# Altium PCB Logger_PCB_2.PcbDoc
Units mm, origin at the board's own origin, x right, y up, seen from the top; angles counter-clockwise.
Board outline 93.13 x 61.13 mm, 2 copper layers (Top Layer, Bottom Layer); 107 components, 63 nets, 336 pads, 0 vias.
Unrouted connection lines stored in the file: 257.
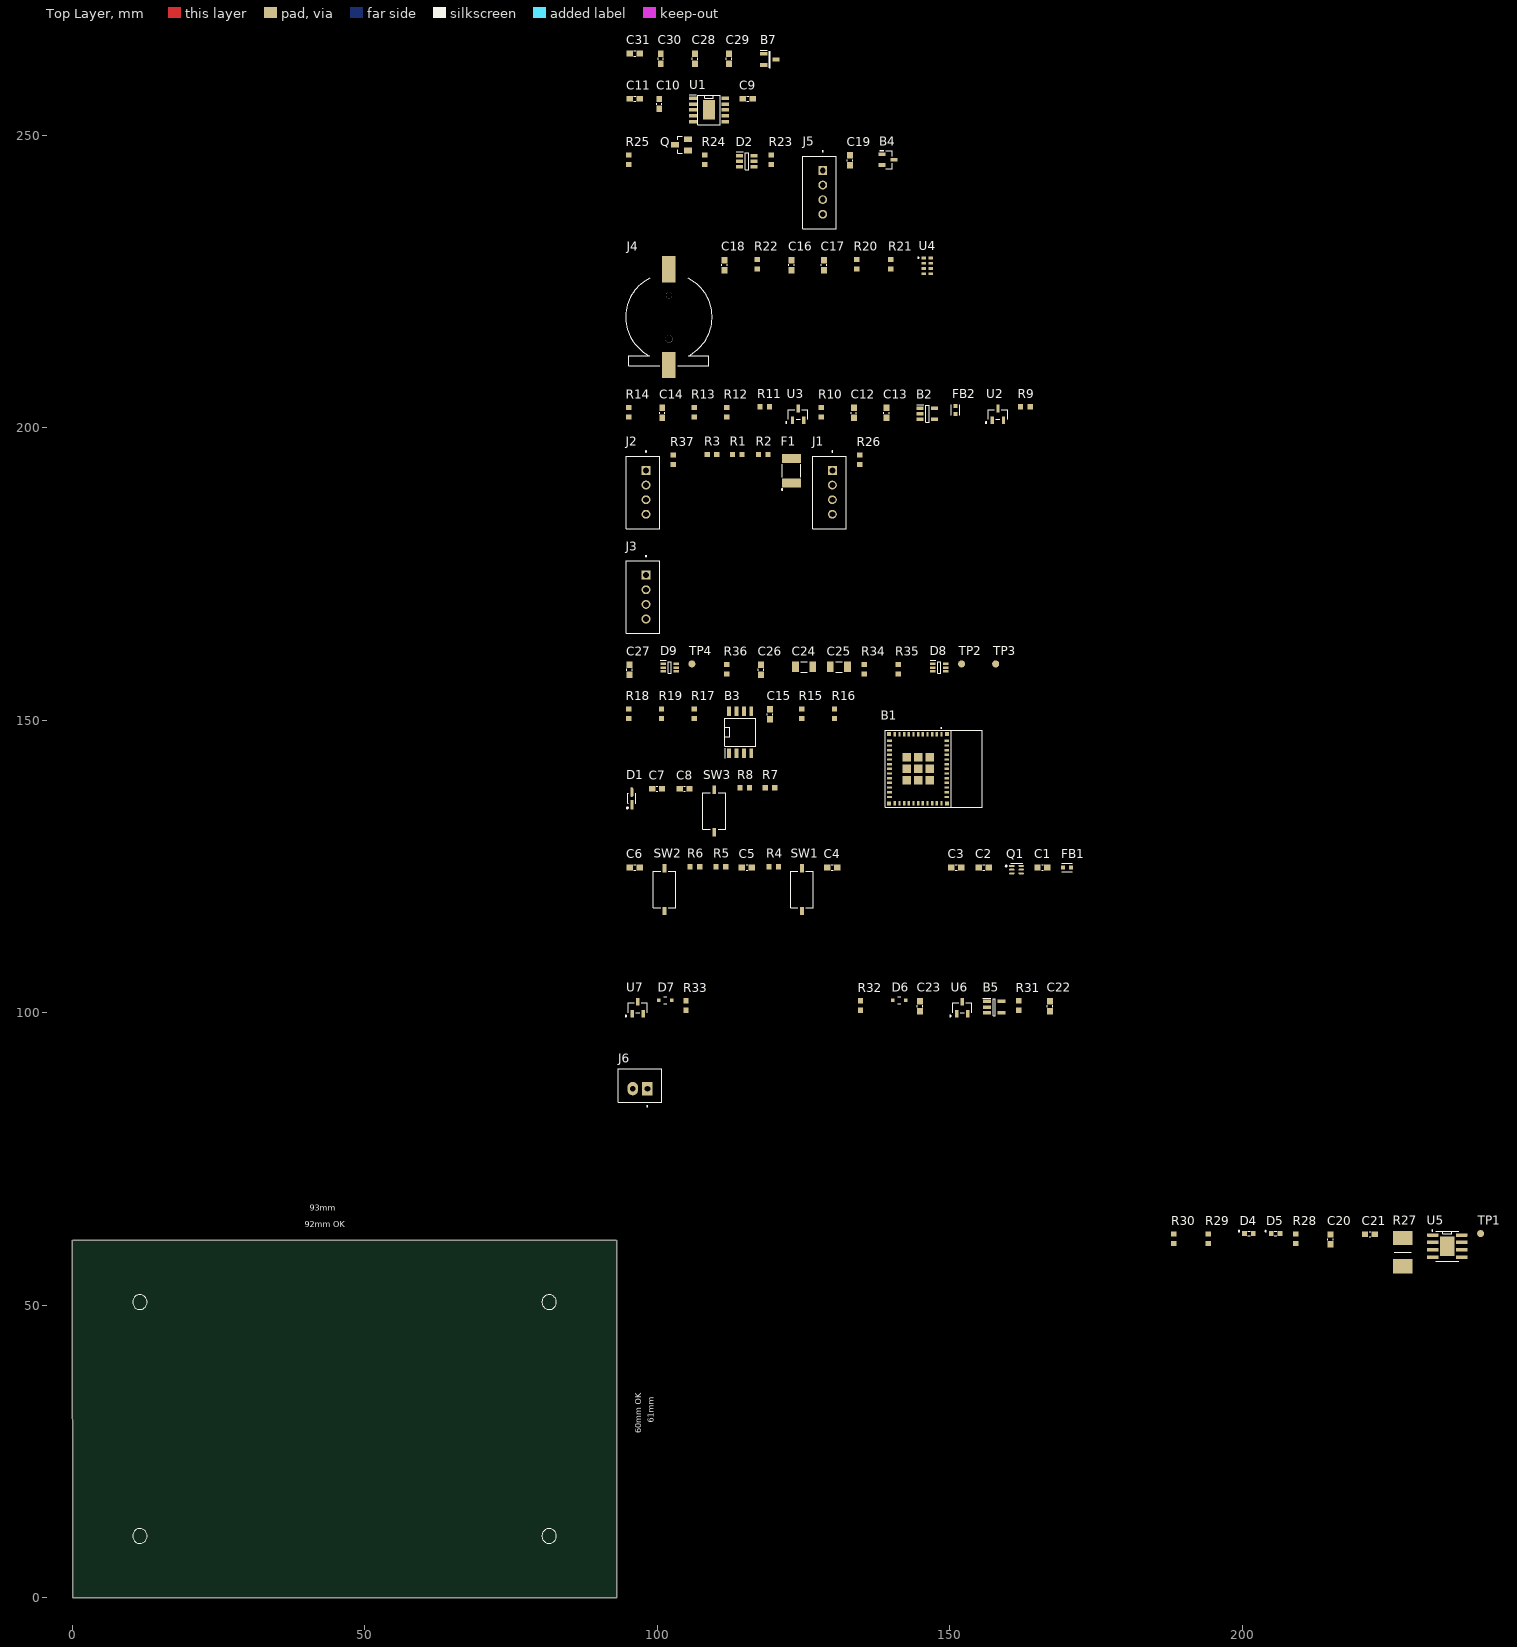
[diagram p0: Top Layer view]
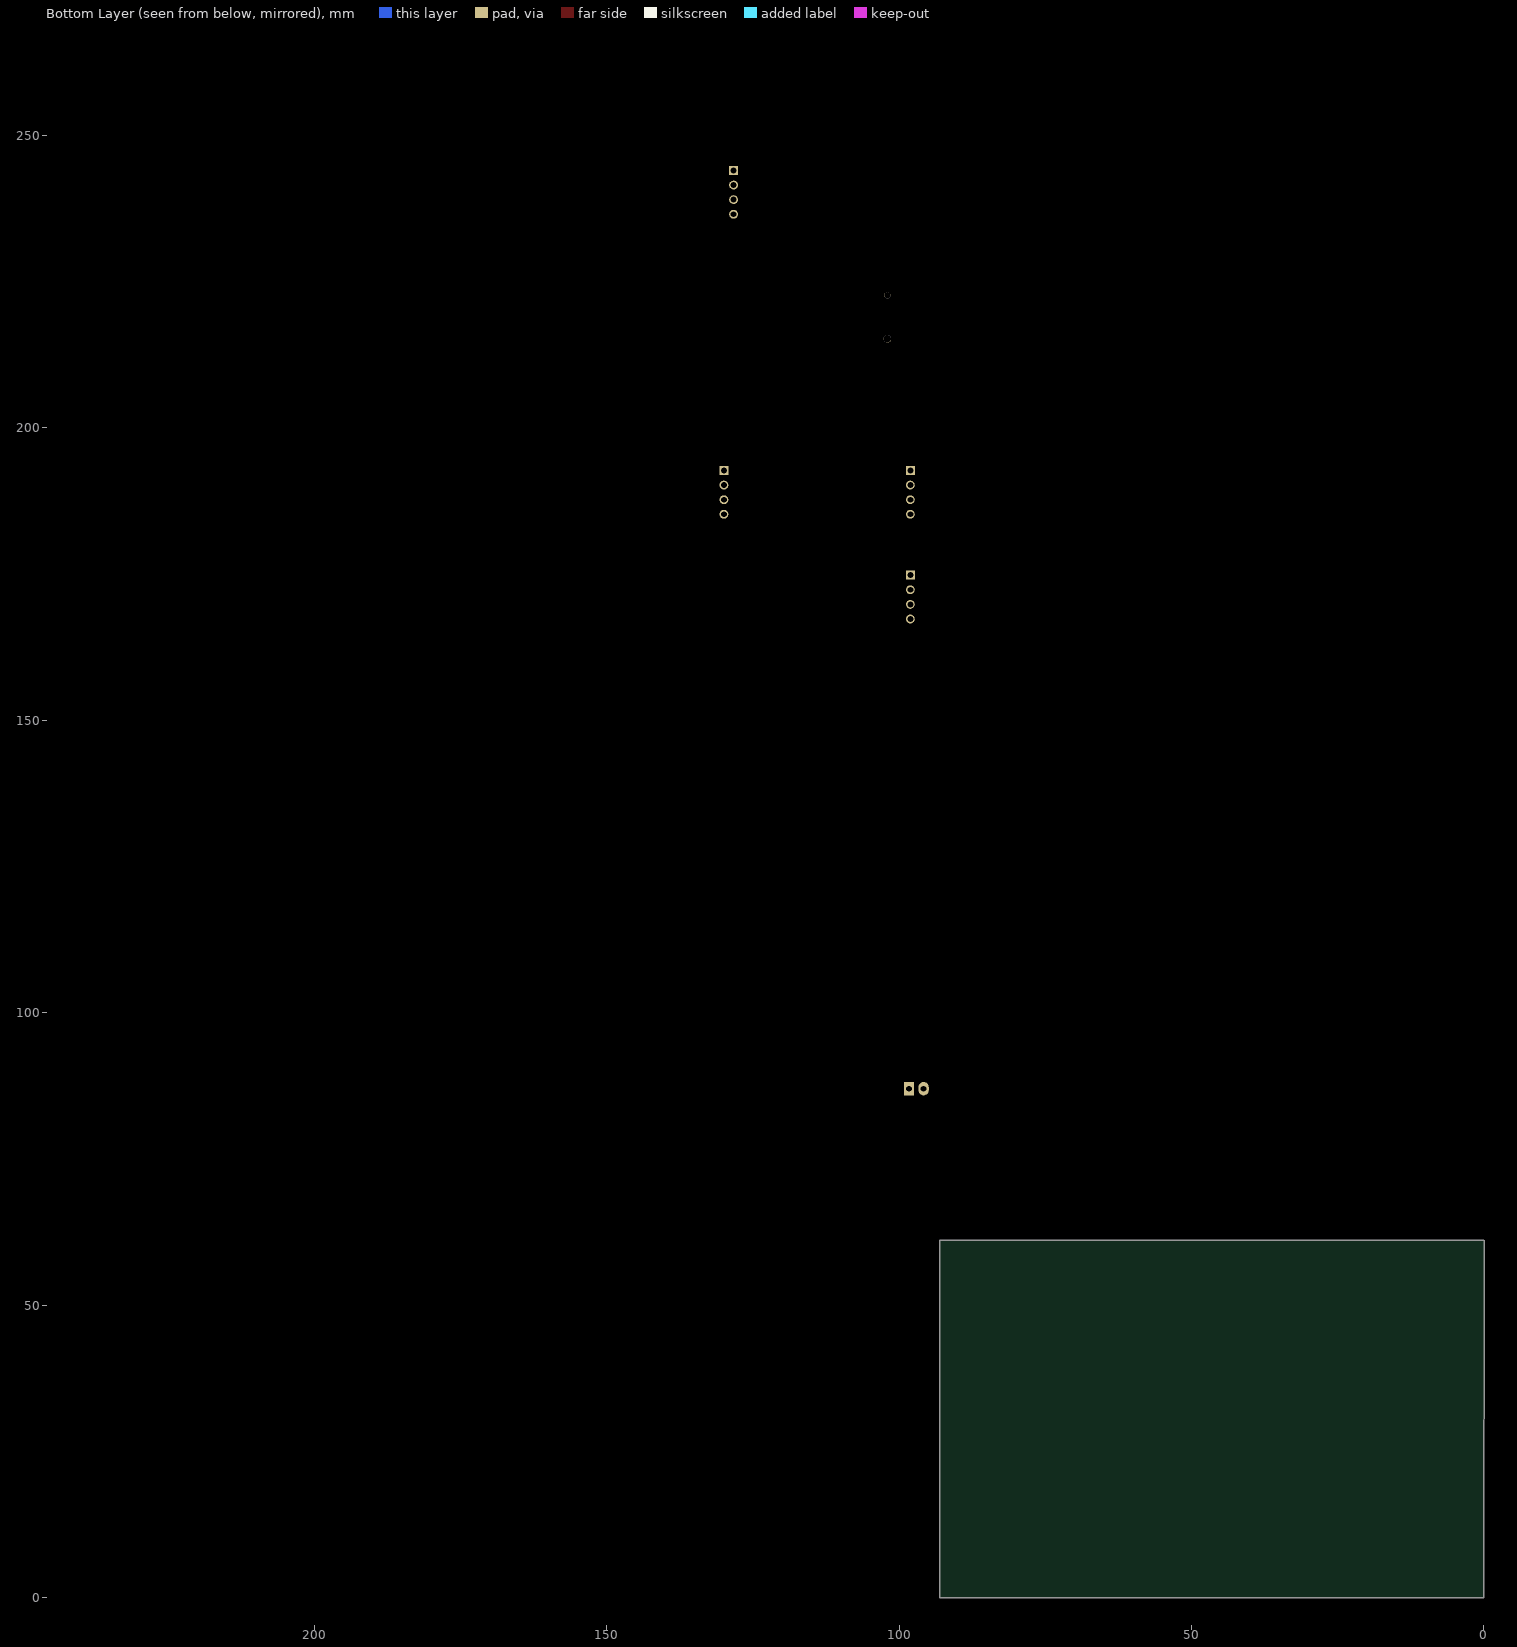
[diagram p1: Bottom Layer view, seen from below]

## Layer stack, top to bottom
Top Solder: solder mask 0.0102, Solder Resist, Dk 3.5
Top Layer: signal copper 0.0356
Dielectric 1: dielectric 0.32, FR-4, Dk 4.8
Bottom Layer: signal copper 0.0356
Bottom Solder: solder mask 0.0102, Solder Resist, Dk 3.5

## Board outline
0,-0.064 93,-0.064 93.064,0 93.064,61 93,61.064 0,61.064 -0.064,61

## Design rules (kind name [scope] priority, off if disabled: settings)
Clearance [All] p1: gap=0.254 ignorepadtopadclearanceinfootprint=FALSE except(0: Arc-Hole Track-Hole SMDPad-Hole THPad-Hole Via-Hole Fill-Hole Poly-Hole Region-Hole Text-Hole)
PolygonConnect [All] p1: connectstyle=Relief reliefconductorwidth=0.254 reliefentries=4 polygonreliefangle="90 Angle" airgapwidth=0.254
RoutingVias [All] p1: holewidth=0.711 width=1.27 viastyle="Through Hole" minholewidth=0.711 minwidth=1.27 maxholewidth=0.711 maxwidth=1.27
SolderMaskExpansion [All] p1: expansion=0.102 istentingtop=FALSE
Width [All] p1: maxlimit=0.254 minlimit=0.254 preferedwidth=0.254
30 further rules are at their usual default settings.

## Classes and differential pairs
net class POWER_NET: 3V3D Mout NetB7_3 VBUS Vin2
component class Voltage_Regulator(ULP): B7 C28 C29 C30 C31
component class USB_Programmer: C9 C10 C11 U1
component class USB_CON: B4 C19 D2 J5 Q R23 R24 R25
component class ULP_RTC: C16 C17 C18 J4 R20 R21 R22 U4
component class ULP_ADC: B2 C12 C13 C14 FB2 R9 R10 R11 R12 R13 R14 U2 U3
component class TopDesign: F1 J1 J2 R1 R2 R3 R26 R37
component class Temp_Sensor: J3
component class Power_MUX: C24 C25 C26 C27 D8 D9 R34 R35 R36 TP2 TP3 TP4
component class NOR_FLASH: B3 C15 R15 R16 R17 R18 R19
component class Designator: C7 C8 D1 R7 R8 SW3
component class Battery_Protection: B5 C22 C23 D6 D7 J6 R31 R32 R33 U6 U7
component class Battery_Charger: C20 C21 D4 D5 R27 R28 R29 R30 TP1 U5

## Components (designator, comment, footprint, x,y, rotation, side; value= is the part's Value field where it differs from the comment)
B1 "ESP32-H2-MINI-1-N4" ESP32-H2-MINI-1-NX 147.3,141.694 r270 top
B2 "MCP3021" MCP3021A5T-E_OT 146.177,202.438 r0 top
B3 "W25Q64JVSSIQ" W25Q64JVSSIQ 114.173,147.955 r90 top
B4 "AP2331W-7" AP2331W-7-(SOT-23-3) 139.446,245.872 r0 top
B5 "DW03" DW03 157.607,100.965 r0 top
B7 "MCP1700T" MCP1700T-SOT23 119.253,263.017 r0 top
C1 "100 nF" CAP_0603 165.862,124.841 r0 top
C2 "22 uF" CAP_0603 155.829,124.841 r0 top
C3 "10 nF" CAP_0603 151.13,124.841 r0 top
C4 "100 nF" CAP_0603 129.921,124.841 r0 top
C5 "1 uF" CAP_0603 115.316,124.841 r0 top
C6 "100 nF" CAP_0603 96.139,124.841 r0 top
C7 "1 uF" CAP_0603 99.949,138.303 r0 top
C8 "100 nF" CAP_0603 104.648,138.303 r0 top
C9 "100 nF" CAP_0603 115.443,256.286 r0 top
C10 "100 nF" CAP_0603 100.33,255.397 r90 top
C11 "100 nF" CAP_0603 96.139,256.286 r0 top
C12 "1 uF" CAP_0603 133.604,202.565 r90 top
C13 "10 nF" CAP_0603 139.192,202.565 r90 top
C14 "100 nF" CAP_0603 100.838,202.565 r90 top
C15 "100 nF" CAP_0603 119.253,151.003 r90 top
C16 "1 uF" CAP_0603 122.936,227.838 r90 top
C17 "100 nF" CAP_0603 128.524,227.838 r90 top
C18 "1 uF" CAP_0603 111.506,227.838 r90 top
C19 "100 nF" CAP_0603 132.969,245.745 r90 top
C20 "10 uF" CAP_0603 215.138,61.214 r90 top
C21 "10 uF" CAP_0603 221.869,62.103 r0 top
C22 "10 uF" CAP_0603 167.132,101.092 r90 top
C23 "100 nF" CAP_0603 144.907,101.092 r90 top
C24 "47 uF" "CAP SMD 1206" 125.095,159.131 r0 top
C25 "100 uF" "CAP SMD 1206" 131.064,159.131 r0 top
C26 "1 uF" CAP_0603 117.729,158.623 r90 top
C27 "1 uF" CAP_0603 95.25,158.623 r90 top
C28 "2.2 uF" CAP_0603 106.426,263.144 r90 top
C29 "10 uF" CAP_0603 112.268,263.144 r90 top
C30 "100 nF" CAP_0603 100.584,263.144 r90 top
C31 "1 uF" CAP_0603 96.139,264.033 r0 top
D1 "BSD3A031V" MCC_SOD-323_IPC_A 95.631,136.652 r90 top
D2 "USBLC6-2SC6" USBLC6-2SC6 115.316,245.618 r0 top
D4 "RED" "LED SMD 0603" 201.168,62.23 r0 top
D5 "YELLOW" "LED SMD 0603" 205.74,62.23 r0 top
D6 "PESD5V0S1BA" TVS_SOD-323 141.351,102.108 r0 top
D7 "PESD5V0S1BA" TVS_SOD-323 101.346,102.108 r0 top
D8 "LM66100DCKR" LM66100DCKR 148.209,159.004 r0 top
D9 "LM66100DCKR" LM66100DCKR 102.108,159.004 r0 top
F1 "MF-MSMF050-2" Fuse_SMD_1812_1A 122.936,192.659 r90 top
FB1 "BLM18KG601SN1D" FBead_Murata_BLM18KG601SN1D 170.053,124.841 r0 top
FB2 "BLM18KG601SN1D" FBead_Murata_BLM18KG601SN1D 151.003,203.073 r90 top
J1 "JST_4P_P=2.5mm" JST_4P_Straight_P=2.5mm 129.413,188.976 r90 top
J2 "JST_4P_P=2.5mm" JST_4P_Straight_P=2.5mm 97.536,188.976 r90 top
J3 "JST_4P_P=2.5mm" JST_4P_Straight_P=2.5mm 97.536,171.069 r90 top
J4 "Bat_Con_CR1220" Bat_Con_CR1220 101.981,218.948 r0 top
J5 "JST_4P_P=2.5mm" JST_4P_Straight_P=2.5mm 127.762,240.284 r90 top
J6 "2_Way_JST" 2_Way_JST_Connector 97.048,86.995 r0 top
Q "MMBT2222*" "Bipolar _BJT_ Transistor" 104.14,248.412 r90 top
Q1 "UMH3NTN-(Dual Transistor With Base Res)" "UMH3NTN-(Dual Transistor With Base Res-SOT-363)" 161.417,124.46 r0 top
R1 "10 KOhm" Res_0603 113.665,195.453 r0 top
R2 "10 KOhm" Res_0603 118.11,195.453 r0 top
R3 "0 Ohm" Res_0603 109.347,195.453 r0 top
R4 "10 KOhm" Res_0603 119.888,124.968 r0 top
R5 "DNP" Res_0603 110.871,124.968 r0 top
R6 "3.3 KOhm" Res_0603 106.426,124.968 r0 top
R7 "33 KOhm" Res_0603 119.253,138.43 r0 top
R8 "1 KOhm" Res_0603 114.935,138.43 r0 top
R9 "100 KOhm" Res_0603 162.941,203.581 r0 top
R10 "33 KOhm" Res_0603 128.016,202.692 r90 top
R11 "4.7 KOhm" Res_0603 118.364,203.581 r0 top
R12 "10 KOhm" Res_0603 111.887,202.692 r90 top
R13 "1  KOhm" Res_0603 106.299,202.692 r90 top
R14 "100 KOhm" Res_0603 95.123,202.692 r90 top
R15 "10 KOhm" Res_0603 124.714,151.13 r90 top
R16 "10 KOhm" Res_0603 130.302,151.13 r90 top
R17 "100 KOhm" Res_0603 106.299,151.13 r90 top
R18 "100 KOhm" Res_0603 95.123,151.13 r90 top
R19 "100 KOhm" Res_0603 100.711,151.13 r90 top
R20 "0 Ohm" Res_0603 134.112,227.965 r90 top
R21 "100 KOhm" Res_0603 139.954,227.965 r90 top
R22 "470 KOhm" Res_0603 117.094,227.965 r90 top
R23 "22KOhm" Res_0603 119.507,245.872 r90 top
R24 "1 KOhm" Res_0603 108.077,245.872 r90 top
R25 "10 KOhm" Res_0603 95.123,245.872 r90 top
R26 "470 Ohm" Res_0603 134.62,194.564 r90 top
R27 "0.2 Ohm , 1W" RES_2512 227.457,59.055 r90 top
R28 "1.33 KOhm , 1%" Res_0603 209.169,61.341 r90 top
R29 "1 KOhm" Res_0603 194.183,61.341 r90 top
R30 "1 KOhm" Res_0603 188.341,61.341 r90 top
R31 "100 Ohm" Res_0603 161.798,101.219 r90 top
R32 "10 KOhm" Res_0603 134.747,101.219 r90 top
R33 "10 KOhm" Res_0603 104.902,101.219 r90 top
R34 "100 Ohm" Res_0603 135.382,158.75 r90 top
R35 "1.5 MOhm" Res_0603 141.224,158.75 r90 top
R36 "100 Ohm" Res_0603 111.887,158.75 r90 top
R37 "560 Ohm" Res_0603 102.743,194.564 r90 top
SW1 "SPST_SMD_Tactile_sw" SPST_SMD_6mm 124.714,121.031 r90 top
SW2 "SPST_SMD_Tactile_sw" SPST_SMD_6mm 101.219,121.031 r90 top
SW3 "SPST_SMD_Tactile_sw" SPST_SMD_6mm 109.728,134.493 r90 top
TP1 "Test_Point" Test_Point 240.792,62.23 r90 top
TP2 "V1" Test_Point 152.019,159.639 r90 top
TP3 "Test_Point" Test_Point 157.861,159.639 r90 top
TP4 "V2" Test_Point 105.918,159.639 r90 top
U1 "CH343K" CH343K 108.839,254.381 r0 top
U2 "SI2333CDS" SOT-23 158.242,202.311 r0 top
U3 "SI2302CDS" SOT-23 124.079,202.311 r0 top
U4 "RV-3028-C7" IC_RV-3028-C7 146.177,227.711 r0 top
U5 "TP4056" TP4056-SOP-8-EP 235.077,60.071 r0 top
U6 "SI2333CDS" SOT-23 152.146,100.838 r0 top
U7 "SI2302CDS" SOT-23 96.647,100.838 r0 top

## Footprints (in the part's own frame and the unit in brackets; to place one, negate y for a bottom-side part, rotate by r counter-clockwise, add the part's x,y. Pads: shape width x height; smd on the part's side, far side on the other; paste and mask are expansions set on the pad)
2_Way_JST_Connector [mm] "2 Way JST Connector, Pitch=2.5mm"
  rect 1.778x2.286 hole 1: 1(1.25,0)
  oval 1.778x2.286 hole 1: 2(-1.25,0)
  silkscreen extent -3.7,-3.07 3.7,3.4, body extent -3.7,-2.35 3.7,3.4, height 7
AP2331W-7-(SOT-23-3) [mm] "AP2331W-7-(SOT-23-3)"
  rrect15% 1.18x0.61 smd: 1(-1.025,0.915) 2(-1.025,-0.915) 3(1.025,0)
  silkscreen extent -1.4,-1.53 0.7,1.53, body extent -1.2,-1.45 1.2,1.45, height 1.2
Bat_Con_CR1220 [mm]
  rect 2.3x4.5 smd: 1(0,-8.2) 2(0,8.2)
  round 1.3 hole 1.3 unplated: MP1(0,-3.725)
  round 1.05 hole 1.05 unplated: MP2(0,3.725)
  silkscreen extent -7.4,-8.31 7.4,6.63, body extent -7.37,-9.6 7.37,9.6, height 4.48
"Bipolar _BJT_ Transistor" [mm] "Bipolar _BJT_ Transistor NPN 30V 600mA 250MHz 350mW Surface Mount SOT-23-3"
  rect 1x1.4 smd: B(-0.95,-1.1) C(0,1.1) E(0.95,-1.1)
  silkscreen extent -1.42,-0.15 1.42,0.66, body extent -1.45,-1.2 1.45,1.2, height 1.11
"CAP SMD 1206" [mm] "CAP SMD 1206, Length 3.20"
  rect 1.16x1.82 smd: 1(-1.475,0) 2(1.475,0)
  silkscreen extent -0.57,-0.9 0.57,0.9, body extent -1.59,-0.8 1.61,0.8, height 0.88
CAP_0603 [mm]
  rect 1.1x1 smd: 1(-0.85,0) 2(0.85,0)
  silkscreen extent -0.15,-0.45 0.15,0.45, body extent -0.85,-0.45 0.75,0.45, height 0.79
CH343K [mm] "ESSOP-10-150mil-1mm"
  rect 2.1x3.3 smd paste-3: 0(0,0)
  rect 1.31x0.6 smd: 1(-2.75,2) 2(-2.75,1) 3(-2.75,0) 4(-2.75,-1) 5(-2.75,-2) 6(2.75,-2) 7(2.75,-1) 8(2.75,0) 9(2.75,1) 10(2.75,2)
  silkscreen extent -3.35,-2.5 1.95,2.59, body extent -3,-2.5 3,2.5, height 1.6
DW03 [mm] "SOT-23-5"
  rect 1.4x0.6 smd: 1(-1.25,0.95) 2(-1.25,0) 3(-1.25,-0.95) 4(1.25,-0.95) 5(1.25,0.95)
  silkscreen extent -1.95,-1.45 0.2,1.5, body extent -1.35,-1.45 1.35,1.45, height 1.45
ESP32-H2-MINI-1-NX [mm] "With_PCB_Antenna"
  rect 0.8x0.4 smd: 1(-5.9,1.3) 2(-5.9,0.5) 3(-5.9,-0.3) 4(-5.9,-1.1) 5(-5.9,-1.9) 6(-5.9,-2.7) 7(-5.9,-3.5) 8(-5.9,-4.3) 9(-5.9,-5.1) 10(-5.9,-5.9) 11(-5.9,-6.7) 25(5.9,-6.7) 26(5.9,-5.9) 27(5.9,-5.1) 28(5.9,-4.3) 29(5.9,-3.5) 30(5.9,-2.7) 31(5.9,-1.9) 32(5.9,-1.1) 33(5.9,-0.3) 34(5.9,0.5) 35(5.9,1.3)
  rect 0.4x0.8 smd: 12(-4.8,-7.6) 13(-4,-7.6) 14(-3.2,-7.6) 15(-2.4,-7.6) 16(-1.6,-7.6) 17(-0.8,-7.6) 18(0,-7.6) 19(0.8,-7.6) 20(1.6,-7.6) 21(2.4,-7.6) 22(3.2,-7.6) 23(4,-7.6) 24(4.8,-7.6) 36(4.8,2.2) 37(4,2.2) 38(3.2,2.2) 39(2.4,2.2) 40(1.6,2.2) 41(0.8,2.2) 42(0,2.2) 43(-0.8,2.2) 44(-1.6,2.2) 45(-2.4,2.2) 46(-3.2,2.2) 47(-4,2.2) 48(-4.8,2.2)
  rect 1.45x1.45 smd: 49(0,-2.7) 54(-1.975,-2.7) 55(-1.975,-4.675) 56(0,-4.675) 57(1.975,-4.675) 58(1.975,-2.7) 59(1.975,-0.725) 60(0,-0.725) 61(-1.975,-0.725)
  rect 0.7x0.7 smd: 50(5.95,2.25) 51(5.95,-7.65) 52(-5.95,-7.65) 53(-5.95,2.25)
  silkscreen extent -7.06,-8.3 6.6,8.3, body extent -6.62,-8.29 6.58,8.31, height 2.55
FBead_Murata_BLM18KG601SN1D [mm]
  rect 0.65x0.7 smd paste+0 mask+0: 1(-0.675,0) 2(0.675,0)
  silkscreen extent -0.87,-0.72 0.87,0.72, body extent -1.1,-0.58 1.1,0.58, height 0.95
Fuse_SMD_1812_1A [mm] "MF-MSMF050-2 1812 Resettable Fuses 1A"
  rect 1.5x3.2 smd: 1(-2.1,0) 2(2.1,0)
  silkscreen extent -3.33,-1.6 1.1,1.73, body extent -2.27,-1.62 2.27,1.62, height 1.1
IC_RV-3028-C7 [mm]
  rect 0.8x0.5 smd: 1(-0.6,1.35) 2(-0.6,0.45) 3(-0.6,-0.45) 4(-0.6,-1.35) 5(0.6,-1.35) 6(0.6,-0.45) 7(0.6,0.45) 8(0.6,1.35)
  silkscreen extent -1.62,1.3 -1.42,1.5, body extent -0.75,-1.6 0.75,1.6, height 0.8
JST_4P_Straight_P=2.5mm [mm] "JST_B4B-XH-A(LF)(SN)"
  rect 1.508x1.508 / inner round 1.508 / far side rect 1.508x1.508 hole 1: 1(3.75,-0.525)
  round 1.508 hole 1: 2(1.25,-0.525) 3(-1.25,-0.525) 4(-3.75,-0.525)
  silkscreen extent -6.2,-2.88 7.1,2.88, body extent -6.2,-2.88 6.2,2.88, height 7
"LED SMD 0603" [mm]
  rect 0.8x0.8 smd: 1(-0.75,0) 2(0.75,0)
  silkscreen extent -1.83,-0.4 0.2,0.53, body extent -0.8,-0.3 0.8,0.3, height 1
LM66100DCKR [mm]
  rect 0.95x0.45 smd: 1(-1.1,0.65) 2(-1.1,0) 3(-1.1,-0.65) 4(1.1,-0.65) 5(1.1,0) 6(1.1,0.65)
  silkscreen extent -1.58,-1 0.28,1.22, body extent -1.05,-1 1.05,1, height 1
MCC_SOD-323_IPC_A [mm]
  rrect100% 1.655x0.516 smd paste+0 mask+0: A(1.076,0)
  rect 1.655x0.516 smd paste+0 mask+0: C(-1.076,0)
  silkscreen extent -1.75,-0.65 0.85,0.88, body extent -2.4,-1.12 2.4,1.12, height 0.25
MCP1700T-SOT23 [mm] "MCP1700T-SOT23"
  rect 1.25x0.65 smd: 1(-1.05,0.95) 2(-1.05,-0.95) 3(1.05,0)
  silkscreen extent -1.68,-1.43 0.08,1.53, body extent -1.32,-1.42 1.05,1.44, height 1.12
MCP3021A5T-E_OT [mm] "SOT-23-5"
  rect 1.2x0.6 smd: 1(-1.25,0.95) 2(-1.25,0) 3(-1.25,-0.95) 4(1.25,-0.95) 5(1.25,0.95)
  silkscreen extent -1.85,-1.48 0.3,1.5, body extent -1.4,-1.48 1.4,1.48, height 1.45
Res_0603 [mm]
  rect 0.89x0.93 smd: 1(-0.814,0) 2(0.814,0)
  body extent -0.8,-0.4 0.8,0.4, height 0.55
RES_2512 [mm] "Resistor SMD 2512"
  rect 2.45x3.3 smd: 1(-2.4,0) 2(2.4,0)
  silkscreen extent 0,-1.45 0,1.45, body extent -3.15,-1.55 3.15,1.55, height 0.8
SOT-23 [mil] "N-MOSFET"
  rect 22x52 smd paste+0 mask+0: 1(-37.4,-40) 2(37.4,-40) 3(0,40)
  silkscreen extent -85,-60 65,32, body extent -60,-52 60,52, height 44
SPST_SMD_6mm [mil] "SPST SMD Tactile Switches 3.6mm X2.5m (6mm)"
  rect 56x26 smd paste+0 mask+0: 1(-143.5,0) 2(143.5,0)
  silkscreen extent -123,-76 123,76, body extent -157,-71 157,71, height 98
Test_Point [mm] "Refernece Point"
  round 1.2 smd paste-0.6: TP?(0,0)
TP4056-SOP-8-EP [mm]
  rrect25% 1.97x0.6 smd: 1(-2.475,1.905) 2(-2.475,0.635) 3(-2.475,-0.635) 4(-2.475,-1.905) 5(2.475,-1.905) 6(2.475,-0.635) 7(2.475,0.635) 8(2.475,1.905)
  rect 2.413x3.302 smd paste-3: 9(0,0)
  silkscreen extent -2.64,-2.55 2,2.77, body extent -3,-2.45 3,2.45, height 1.75
TVS_SOD-323 [mm]
  rect 0.6x0.6 smd: 1(-1.1,0) 2(1.1,0)
  silkscreen extent -0.25,-0.63 0.25,0.63, body extent -1.23,-0.63 1.25,0.62, height 0.93
"UMH3NTN-(Dual Transistor With Base Res-SOT-363)" [mm] "SOT-363"
  rect 0.909x0.336 smd paste+0 mask+0: 1(-0.802,0.65)
  rrect100% 0.909x0.336 smd paste+0 mask+0: 2(-0.802,0) 3(-0.802,-0.65) 4(0.802,-0.65) 5(0.802,0) 6(0.802,0.65)
  silkscreen extent -1.88,0.53 1.08,1.09, body extent -1.36,-1.1 1.36,1.1, height 0.25
USBLC6-2SC6 [mm] "SOT-23-6L"
  rect 1.2x0.6 smd: 1(-1.25,0.95) 2(-1.25,0) 3(-1.25,-0.95) 4(1.25,-0.95) 5(1.25,0) 6(1.25,0.95)
  silkscreen extent -1.85,-1.46 0.3,1.6, body extent -1.4,-1.46 1.4,1.46, height 1.45
W25Q64JVSSIQ [mm] "SOIC-08"
  rect 1.65x0.65 smd: 1(-3.6,1.905) 2(-3.6,0.635) 3(-3.6,-0.635) 4(-3.6,-1.905) 5(3.6,-1.905) 6(3.6,-0.635) 7(3.6,0.635) 8(3.6,1.905)
  silkscreen extent -4.43,-2.64 2.42,2.67, body extent -3.95,-2.64 3.95,2.64, height 2.16

## Part data
B1: library part ESP32-H2-MINI-1-XX, "Multiprotocol Modules ENGINEERING SAMPLE Bluetooth Low Energy and IEEE 802.15.4  module with ESP32-H2 chip", LCSC=N-C18203134/U-C22470215, Manufacturer_Name="Espressif Systems", Datasheet Link=https://www.espressif.com/sites/default/files/documentation/esp32-h2-mini-1_mini-1u_datasheet_en.pdf, Geometry.Height=2.55mm, Manufacturer_Part_Number=ESP32-H2-MINI-1-N4
B2: library part MCP3021A5T-E_OT, "ADC - ,SAR, Single Ended ,10-bit ,I2C , 250uA-Active ,1uA -Standby", LCSC=C128576, Manufacturer_Name=Microchip, Manufacturer_Part_Number=MCP3021A5T-E/OT, Datasheet Link=https://lcsc.componentsearchengine.com/Datasheets/2/MCP3021A5T-E_OT.pdf, Foot Print=SOT-23-5, Geometry.Height=1.45mm
B3: "64Mb Serial NOR Flash 133MHz SOP864Mbit 2.7V~3.6V 133MHz SPI SOIC-8-208mil Memory (ICs) ROHS", LCSC=C179171, Manufacturer_Name=Winbond, Datasheet Link=https://www.winbond.com/hq/search-resource-file.jsp?partNo=W25Q64JVSSIQ&type=datasheet, Geometry.Height=2.16mm, Manufacturer_Part_Number=W25Q64JVSSIQ
B4: "High Side Current limited Load Switch 2.7V~5.2V 250mΩ 200mA", LCSC="SC-59 : C460346 , SOT23 :  C500764", Manufacturer_Name="Diodes Incorporated", Package="SC-59 , SOT-23", Datasheet Link=https://www.diodes.com//assets/Datasheets/AP2331.pdf, Geometry.Height=1.3mm, Manufacturer_Part_Number=AP2331W-7
B5: "2K 256X8 1.8V Ser.EEPROM,24AA02E48T-I/OT", LCSC=C18198382, Manufacturer_Name="HXY MOSFET", Datasheet Link=https://www.lcsc.com/datasheet/C18198382.pdf, Geometry.Height=1.45mm, Manufacturer_Part_Number=DW03
B7: library part MCP1700T-SOT23, "LDO voltage regulator 250mA Isupply 1.6uA", LCSC=C39051, MPN=Microchip, Datasheet Link=https://datasheet.datasheetarchive.com/originals/distributors/SFDatasheet-4/sf-00090030.pdf, Geometry.Height=1.12mm, Iq="1.6 uA", MFPN=MCP1700T-3302E/TT
C1 C2 C3 C4 C5 C6 C7 C8 C9 C10 C11 C12 C13 C14 C15 C16 C17 C18 C19 C24 C25 C26 C27 C28 C29 C30 C31: library part "Cap SMD", "Cap SMD."
C20 C21 C22 C23: library part Cap_SMD_New, "Cap Ceramic 1uF 10V X5R 10% Pad SMD 0402 85C T/R", Arrow Part Number=CL05A105KP5NNNC, Manufacturer_Name=SAMSUNG, Mouser Part Number=187-CL05A105KP5NNNC, Arrow Price/Stock=https://www.arrow.com/en/products/cl05a105kp5nnnc/samsung-electro-mechanics?region=nac, Datasheet Link=https://www.arrow.com/en/products/cl05a105kp5nnnc/samsung-electro-mechanics, Geometry.Height=0.55mm, Manufacturer_Part_Number=CL05A105KP5NNNC, Mouser Price/Stock=https://www.mouser.co.uk/ProductDetail/Samsung-Electro-Mechanics/CL05A105KP5NNNC?qs=X6jEic%2FHinBsUeNeR9HD7w%3D%3D
D1: library part TVS_Diode_Single, "TVS Diode (Uni-directional)", Arrow Part Number=SMAJ14A, Manufacturer_Name=LITTELFUSE, Mouser Part Number=576-SMAJ14A, Arrow Price/Stock=https://www.arrow.com/en/products/smaj14a/littelfuse?region=nac, Datasheet Link=https://componentsearchengine.com/Datasheets/2/SMAJ14A.pdf, Height=2.29mm, Manufacturer_Part_Number=SMAJ14A, Mouser Price/Stock=https://www.mouser.co.uk/ProductDetail/Littelfuse/SMAJ14A?qs=HR2RnyOI4E4Xmn1pka9YNw%3D%3D
D2: "5A 17V 6V Unidirectional 5.25V SOT-23-6L ESD and Surge Protection (TVS/ESD) ROHS , 2 data-line USB 2.0 protection, Protects VBUS, capacitance: 3.5 pF", LCSC=C7519, MPN="ST Micro Electronics", Package=SOT-23-6L, Application="USB 2.0 , Data & Power Protection", Datasheet=https://www.st.com/resource/en/datasheet/usblc6-2.pdf, MFPN=USBLC6-2SC6
D4 D5: library part "LED SMD", "SMD LED"
D6 D7: library part TVS_Diode_Bi-Direcctional, "Diode ESD (Bi-directional)", Arrow Part Number=PESD12VL1BA,115, Manufacturer_Name=Nexperia, Mouser Part Number=771-PESD12VL1BA-T/R, Arrow Price/Stock=https://www.arrow.com/en/products/pesd12vl1ba115/nexperia?region=europe, Datasheet Link=https://assets.nexperia.com/documents/data-sheet/PESDXL1BA_SER.pdf, Height=1.1mm, Manufacturer_Part_Number=PESD12VL1BA,115, Mouser Price/Stock=https://www.mouser.co.uk/ProductDetail/Nexperia/PESD12VL1BA115?qs=LOCUfHb8d9tizc9iojOZUw%3D%3D
D8 D9: "+/-6-V, Low IQ ideal diode with input polarity protection", LCSC=C2869734, Manufacturer_Name="Texas Instruments", Datasheet Link=http://www.ti.com/lit/gpn/LM66100, Geometry.Height=1.1mm, Manufacturer_Part_Number=LM66100DCKR
F1: "Polymeric PTC Resettable Fuse 15V 500 mA Ih Surface Mount 1812 (4532 Metric), Concave", Package="1812 Bourns", Availability="In Stock", Check_prices=https://www.snapeda.com/parts/MF-MSMF050-2/Bourns+-+J.W.+Miller/view-part/?ref=eda, MF=Bourns, MP=MF-MSMF050-2, Price=None, Purchase-URL=https://pricing.snapeda.com/search/part/MF-MSMF050-2/?ref=eda, SnapEDA_Link=https://www.snapeda.com/parts/MF-MSMF050-2/Bourns+-+J.W.+Miller/view-part/?ref=snap
J1 J2 J3 J5: "Connector Header Through Hole 4 position 0.098 (2.50mm)", Package=None, Check_prices=https://www.snapeda.com/parts/B4B-XH-A(LF)(SN)/JST+Sales+America+Inc./view-part/?ref=eda, MF="JST Sales", MP=B4B-XH-A(LF)(SN), SnapEDA_Link=https://www.snapeda.com/parts/B4B-XH-A(LF)(SN)/JST+Sales+America+Inc./view-part/?ref=snap
J4: "Connector", LCSC=C969906, Manufacturer_Name=Harwin, Manufacturer_Part_Number=S8411-45R, Mouser Part Number=855-S8411-45R, Datasheet Link=https://cdn.harwin.com/pdfs/S8411R.pdf, Mouser Price/Stock=https://www.mouser.co.uk/ProductDetail/Harwin/S8411-45R?qs=Qom7kyPojXY6B0JhnWxDgQ%3D%3D
J6: library part 2_Way_JST_Connector, "Connector Header Through Hole 2 position 0.098 (2.50mm)", Package=None, Availability="In Stock", Check_prices=https://www.snapeda.com/parts/B2B-XH-A(LF)(SN)/JST%20Sales%20America%20Inc./view-part/492310/?ref=eda, MF="JST Sales", MP=B2B-XH-A(LF)(SN), Price=None, SnapEDA_Link=https://www.snapeda.com/parts/B2B-XH-A(LF)(SN)/JST%20Sales%20America%20Inc./view-part/492310/?ref=snap
Q: "Bipolar _BJT_ Transistor NPN 30V 600mA 250MHz 350mW Surface Mount SOT-23-3", Package="SOT-23-3 Fairchild Semiconductor", Availability=Unavailable, MF="ON Semiconductor", MP=MMBT2222, Price=None, SnapEDA_Link=https://www.snapeda.com/parts/MMBT2222/ON%20Semiconductor/view-part/214298/?ref=snap
Q1: "UMH3NTN-(Dual Transistor With Base Res = 4.7K) , 100@1mA,5V 150mW 100mA 50V SOT-363 Digital Transistors ROHS", LCSC=C123008, MPN=ROHM, Datasheet=https://www.lcsc.com/datasheet/C123008.pdf, MFPN=UMH3NTN
R1 R2 R3 R4 R5 R6 R7 R8 R9 R10 R11 R12 R13 R14 R15 R16 R17 R18 R19 R20 R21 R22 R23 R24 R25 R26 R27 R28 R29 R30 R31 R32 R33 R34 R35 R36 R37: library part "Res smd", "SMD Resistor", Package="2012 Rohm Semiconductor", Availability=Unavailable, MF=Yageo, MP=RC0805FR-07330RL, Price=None, SnapEDA_Link=https://www.snapeda.com/parts/RC0805FR-07330RL/Yageo/view-part/106115/?ref=snap
SW1 SW2 SW3: "SPST SMD Tactile Switches Rectangle button Brick nogging", Mfr_Name="XKB Connectivity"
TP2 TP4: library part Test_Point
U1: "USB to UART USB 2.0 ESSOP-10-150mil-1mm Interface Controllers ROHS", LCSC=C5832295, Package=ESSOP-10, Check_prices=https://www.lcsc.com/product-detail/C5832295.html?s_z=n_CH343, Datasheet=https://www.lcsc.com/datasheet/C5832295.pdf, MF=WCH, MP=CH343K
U2 U6: "P-Channel  MOSFET Vds=12V ,RDS(on)=35mOhm .  at VGS = 4.5 V", LCSC=C48179, Mfr_Name=Vishay, Type=P-MOSFET
U3 U7: "N-Channel  MOSFET Vds=20V ,RDS(on)=57mOhm .  at VGS = 4.5 V", LCSC=C10488, Mfr_Name=Vishay, Type=N-MOSFET
U4: "Real Time Clock (RTC) IC Clock/Calendar 2B, 43B IÂ²C, 2-Wire Serial 8-WCDFN", LCSC=C3304278, Package=SMD3215-8P, MF="Micro Crystal", MFPN="RV-3028-C7 32.768KHZ 1PPM-TA-QA", SnapEDA_Link=https://www.snapeda.com/parts/RV-3028-C7%2032.768KHZ%201PPM-TA-QA/Micro+Crystal/view-part/?ref=snap
U5: "Complete single cell Li-Ion battery with a constant current / constant voltage linear charger(SOP 8)", LCSC=C7473158, Datasheet=https://dlnmh9ip6v2uc.cloudfront.net/datasheets/Prototyping/TP4056.pdf, MFPN=TP4056

## Nets (pads, with @x,y where several pads share a name; then routed paths per layer and width w, separated by ;. In a path a pad name is that pad's centre, name@x,y a point inside that pad or via, vN(x,y) a via of type N, cw(c..) or ccw(c..) an arc to the next point about the centre after c; other vN are vias at no path point)
3V3_ESP: B1.3 C1.2 C2.2 C3.2 FB1.1
3V3D: B3.8 B7.2 C9.2 C15.2 C16.2 C17.2 C29.2 C30.2 FB1.2 FB2.2 J3.4 R1.2 R2.2 R6.2 R7.2 R15.2 R16.2 R21.2 R23.1 U1.7 U4.7
ADC_ON: B1.5 R11.2 R12.1
B-: B5.2 C23.1 D7.1 U7.2
BOOT: B1.23 C6.2 Q1.6 R5.1 SW2.1
BTN: B1.13 C7.2 C8.2 D1.C J2.4 R7.1 R8.1 R8.2 SW3.1
CHIP_PU: B1.8 C4.2 C5.2 Q1.3 R4.1 SW1.1
CHRG: R30.1 U5.7
CLK: B1.21 B3.6 R19.2
CS: B1.20 B3.1 R15.1
DTR_USB: Q1.1 Q1.5 U1.6
ESP_VBAT: B1.15 R4.2 R5.2
FLASH_SDI: B1.24 B3.5 R18.2
FLASH_SDO: B1.16 B3.2 R17.2
GND: B1.1 B1.2 B1.11 B1.14 B1.36 B1.37 B1.38 B1.39 B1.40 B1.41 B1.42 B1.43 B1.44 B1.45 B1.46 B1.47 B1.48 B1.49 B1.50 B1.51 B1.52 B1.53 B1.54 B1.55 B1.56 B1.57 B1.58 B1.59 B1.60 B1.61 B2.2 B3.4 B4.1 B5.4 B5.5 B7.1 C1.1 C2.1 C3.1 C4.1 C5.1 C6.1 C7.1 C8.1 C9.1 C10.2 C11.1 C12.1 C13.1 C14.1 C15.1 C16.1 C17.1 C18.1 C19.2 C20.1 C21.1 C22.1 C24.1 C25.1 C26.1 C27.1 C28.1 C29.1 C30.1 C31.1 D1.A D2.2 D8.2 D9.2 D9.5 J1.2 J2.2 J2.3 J3.3 J4.2 J5.4 Q.E R12.2 R14.1 R17.1 R18.1 R19.1 R20.2 R28.1 SW1.2 SW2.2 SW3.2 U1.0 U1.3 U3.2 U4.5 U5.1 U5.3 U5.9
LED: B1.6 R37.2
LOG: B1.22 R6.1
Mout: C24.2 C25.2 D8.6 D9.6 F1.2 R35.1 TP3.TP?
NetB2_1: B2.1 C12.2 C13.2 FB2.1
NetB2_3: B2.3 R13.1
NetB4_3: B4.3 C19.1 J5.1
NetB5_3: B5.3 C23.2 R31.1
NetB7_3: B7.3 C28.2 C31.2 J1.4
NetC11_2: C11.2 U1.10
NetC14_2: C14.2 R10.1 R13.2 R14.2
NetD4_1: D4.1 R30.2
NetD5_1: D5.1 R29.2
NetD6_1: D6.1 R32.2 U6.1
NetD7_2: D7.2 R33.1 U7.1
NetD8_3: D8.3 R36.1
NetD9_3: D9.3 R34.2
NetF1_1: F1.1 J1.3
NetJ1_1: J1.1 R26.1
NetJ2_1: J2.1 R37.1
NetJ4_1: J4.1 R22.1
NetJ6_1: J6.1 R33.2 U6.3
NetJ6_2: J6.2 R32.1 U7.3
NetQ_B: Q.B R25.1
NetQ_C: Q.C R23.2 R24.2
NetR3_2: R3.2 R21.1 U4.2
NetR9_1: R9.1 U2.1 U3.3
NetR10_2: R10.2 U2.3
NetR11_1: R11.1 U3.1
NetR20_1: R20.1 U4.8
NetR28_2: R28.2 U5.2
R\T\C\_\I\N\T\: B1.9 R3.1
RTS_USB: Q1.2 Q1.4 U1.5
RX_USB: B1.31 U1.9
SCL: B1.19 B2.5 J3.2 R1.1 U4.3
SDA: B1.18 B2.4 J3.1 R2.1 U4.4
ST_PIN: B1.10 D8.5 R35.2
STNDBY: R29.1 U5.6
TP4056_VCC: C20.2 R27.2 TP1.TP? U5.4 U5.8
TX_USB: B1.30 U1.8
USB_D+: B1.26
USB_D-: B1.27
USB_DET: B1.12 R24.1
USB_PRG_N: D2.1 D2.6 J5.2 U1.2
USB_PRG_P: D2.3 D2.4 J5.3 U1.1
VBACK: C18.2 R22.2 U4.6
VBUS: B4.2 C10.1 C26.2 D2.5 D4.2 D5.2 D8.1 R25.2 R26.2 R27.1 R34.1 TP2.TP? U1.4
Vin2: C21.2 C22.2 C27.2 D6.2 D9.1 R9.2 R31.2 R36.2 TP4.TP? U2.2 U5.5 U6.2
WP_HLD: B3.3 B3.7 R16.1
pads on no net: B1.4 B1.7 B1.17 B1.25 B1.28 B1.29 B1.32 B1.33 B1.34 B1.35 B5.1 D8.4 D9.4 J4.MP1 J4.MP2 U4.1

## Silkscreen, mask and mechanical layers (free items; w line width, h text height)
Top Overlay:
  circle w0.01: c11.5,10.5 r1.25
  circle w0.01: c81.5,10.5 r1.25
  circle w0.01: c81.5,50.5 r1.25
  circle w0.01: c11.5,50.5 r1.25
  text "93mm" at 40.559,66.086 h1
  text "92mm OK" at 39.67,63.292 h1
  text "61mm" at 99.395,29.891 h1 r90
  text "60mm OK" at 97.236,28.113 h1 r90
Mechanical 13:
  circle w0.01: c69,7 r1.5
  circle w0.01: c24,7 r1.5
  circle w0.01: c69,54 r1.5
  circle w0.01: c24,54 r1.5
  circle w0.01: c86.5,30.5 r1.5
  circle w0.01: c6.5,30.5 r1.5
  lines w0.127: 11.493,10.499 11.497,10.499 ; 11.496,50.5 11.5,50.5 ; 81.499,50.497 81.51,50.497 ; 92.964,0 93,0 ; 11.5,50.5 0,50.5 0,10.5 11.5,10.5 11.5,0 81.5,0 81.5,10.5 93,10.5 93,50.5 81.5,50.5 81.5,61 11.5,61 11.5,50.5